# Altium PCB FlexPCB2.PcbDoc (part 1 of 2)
Units mm, origin at the board's own origin, x right, y up, seen from the top; angles counter-clockwise.
Board outline 299.18 x 60.96 mm, 2 copper layers (Top Layer, Bottom Layer); 124 components, 64 nets, 409 pads, 134 vias.
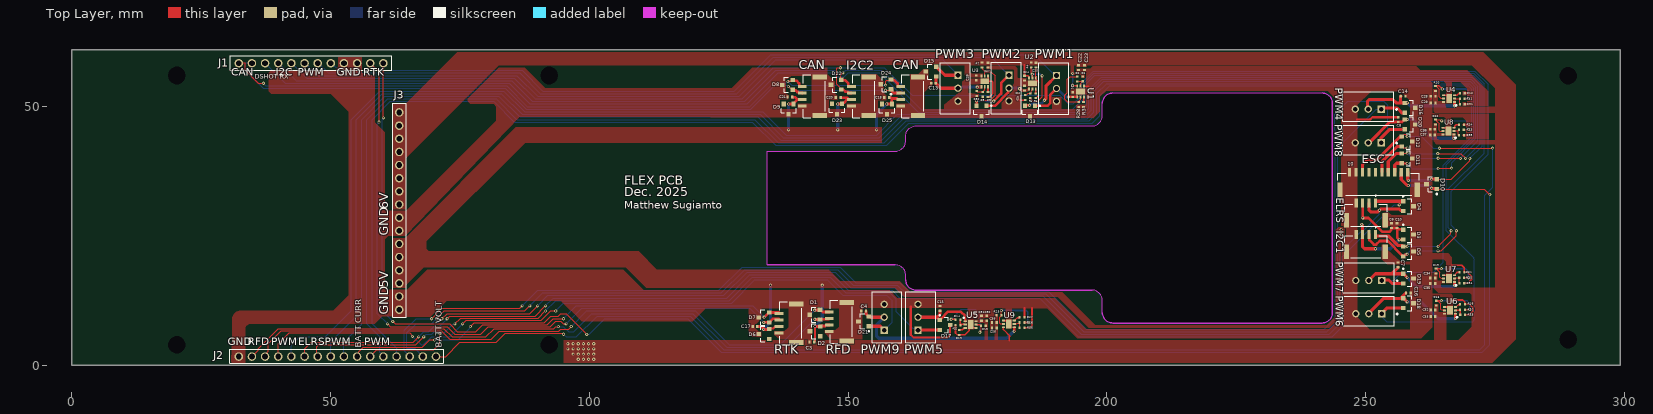
[diagram p0: Top Layer view]
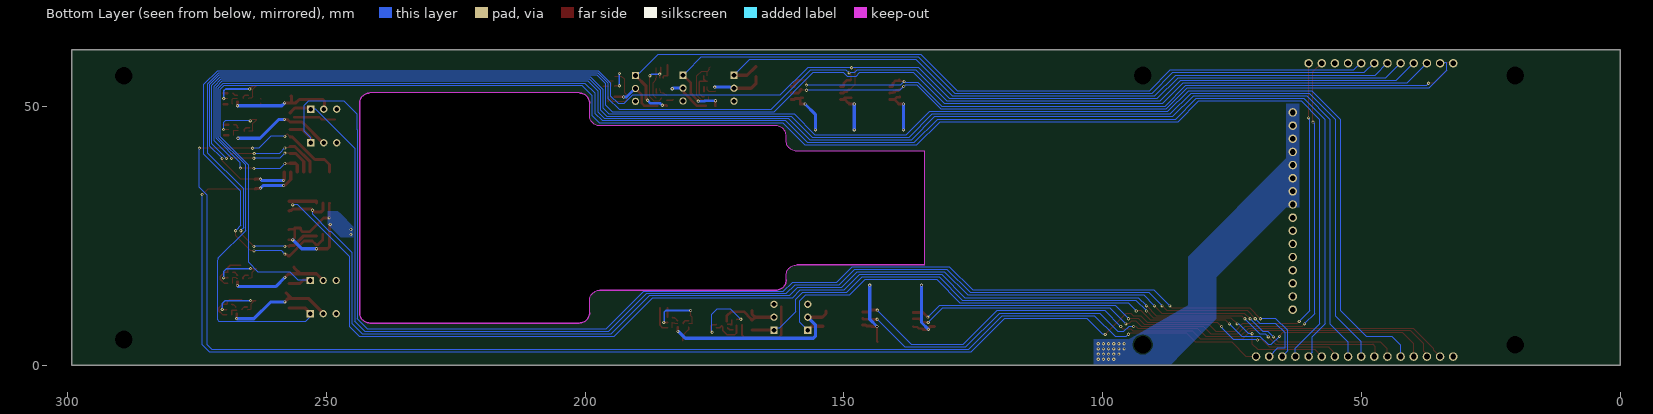
[diagram p1: Bottom Layer view, seen from below]

## Layer stack, top to bottom
Top Solder: solder mask 0.012, FC-001, Dk 4
Top Solder: solder mask 0.0102, Solder Resist, Dk 3.5
Top Layer: signal copper 0.0356
Dielectric 1: dielectric 0.32, FR-4, Dk 4.8
Bottom Layer: signal copper 0.0356
Flex Bottom Coverlay: solder mask 0.0102, Solder Resist, Dk 3.5
Flex Bottom Coverlay: solder mask 0.012, FC-001, Dk 4

## Board outline
0,0 299.175,0 299.175,60.96 0,60.96
cut-out: 161.136,44.274 cw(c163.136,44.274) 163.136,46.274 197.136,46.274 ccw(c197.136,48.274) 199.136,48.274 199.136,50.624 cw(c201.136,50.624) 201.136,52.624 241.586,52.624 cw(c241.586,50.624) 243.586,50.624 243.586,10.174 cw(c241.586,10.174) 241.586,8.174 201.136,8.174 cw(c201.136,10.174) 199.136,10.174 199.136,12.524 ccw(c197.136,12.524) 197.136,14.524 163.136,14.524 cw(c163.136,16.524) 161.136,16.524 161.136,17.399 ccw(c159.136,17.399) 159.136,19.399 134.366,19.399 134.366,41.399 159.136,41.399 ccw(c159.136,43.399) 161.136,43.399

## Design rules (kind name [scope] priority, off if disabled: settings)
Clearance [All] p1: gap=0.2 ignorepadtopadclearanceinfootprint=FALSE except(0.22: Arc-SMDPad Arc-THPad Track-SMDPad Track-THPad SMDPad-Fill SMDPad-Poly SMDPad-Region THPad-Fill THPad-Poly THPad-Region)
DiffPairsRouting [All] p1: maxlimit=0.089 minlimit=0.089 mostfreqgap=0.089 toplayer_minwidth=0.089 toplayer_maxwidth=1816.048 toplayer_prefwidth=0.089 bottomlayer_minwidth=0.089 bottomlayer_maxwidth=1816.048 bottomlayer_prefwidth=0.089 substack1={177C2C85-C0F3-46FA-9A4B-C3A18B66C70F} toplayer_{177c2c85-c0f3-46fa-9a4b-c3a18b66c70f}_mingap=0.2 toplayer_{177c2c85-c0f3-46fa-9a4b-c3a18b66c70f}_maxgap=0.3 toplayer_{177c2c85-c0f3-46fa-9a4b-c3a18b66c70f}_prefgap=0.3 toplayer_{177c2c85-c0f3-46fa-9a4b-c3a18b66c70f}_minwidth=0.089 toplayer_{177c2c85-c0f3-46fa-9a4b-c3a18b66c70f}_maxwidth=1816.048 toplayer_{177c2c85-c0f3-46fa-9a4b-c3a18b66c70f}_prefwidth=0.089 bottomlayer_{177c2c85-c0f3-46fa-9a4b-c3a18b66c70f}_mingap=0.2 bottomlayer_{177c2c85-c0f3-46fa-9a4b-c3a18b66c70f}_maxgap=0.3 bottomlayer_{177c2c85-c0f3-46fa-9a4b-c3a18b66c70f}_prefgap=0.3 bottomlayer_{177c2c85-c0f3-46fa-9a4b-c3a18b66c70f}_minwidth=0.089 bottomlayer_{177c2c85-c0f3-46fa-9a4b-c3a18b66c70f}_maxwidth=1816.048 bottomlayer_{177c2c85-c0f3-46fa-9a4b-c3a18b66c70f}_prefwidth=0.089 filterlayerstackid={177C2C85-C0F3-46FA-9A4B-C3A18B66C70F} maxuncoupledlength=12.7
HoleSize [All] p1: absolutevalues=TRUE maxlimit=5 minlimit=0.025 maxpercent=80.000 minpercent=20.000
MinimumSolderMaskSliver [All] p1: minsoldermaskwidth=0.155
PolygonConnect [All] p1: connectstyle=Direct reliefconductorwidth=0.254 reliefentries=4 polygonreliefangle="90 Angle" airgapwidth=0.254
RoutingVias [All] p1: holewidth=0.711 width=1.27 viastyle="Through Hole" minholewidth=0.711 minwidth=1.27 maxholewidth=0.711 maxwidth=1.27
SilkToSilkClearance [All] p1: silktosilkclearance=0.16
SilkToSolderMaskClearance [IsPad] p1: minsilkscreentomaskgap=0.16 clearancetoexposedcopper=TRUE
SolderMaskExpansion [All] p1: expansion=0.102 istentingtop=FALSE
SupplyNets "Schematic Supply Nets_3" [InNet('V_OUT_SERVO')] p1: voltage=0.000
SupplyNets "Schematic Supply Nets_2" [InNet('+5')] p2: voltage=0.000
SupplyNets "Schematic Supply Nets" [InNet('GND')] p3: voltage=0.000
Width Width_0.3mm [InNet('No Net')] p1: maxlimit=0.3 minlimit=0.15 preferedwidth=0.3 substack1={177C2C85-C0F3-46FA-9A4B-C3A18B66C70F} toplayer_{177c2c85-c0f3-46fa-9a4b-c3a18b66c70f}_minwidth=0.2 bottomlayer_{177c2c85-c0f3-46fa-9a4b-c3a18b66c70f}_minwidth=0.2 minimp=50.000000 maximp=50.000000 favimp=50.000000
Width Width_0.5mm [All] p2: maxlimit=2 minlimit=0.2 preferedwidth=0.3 substack1={177C2C85-C0F3-46FA-9A4B-C3A18B66C70F} minimp=50.000000 maximp=50.000000 favimp=50.000000
25 further rules are at their usual default settings.

## Classes and differential pairs
component class efuse: C22 C23 C24 C25 C26 C27 C28 C29 C30 C31 C32 C33 C34 C35 C36 C37 C38 C39 R1 R2 R4 R5 R6 R7 R8 R9 R10 R11 R12 R13 R14 R15 R16 R17 R18 R19 R20 R21 R22 R23 R24 R25 R26 R27 R28 R29 R30 R31 R32 R33 R34 R35 R36 U1 U2 U3 U4 U5 U6 U7 U8 U9
component class Connectors_Wires: C3 C4 C6 C7 C8 C10 C11 C12 C13 C14 C15 C16 C17 C18 C20 C21 CAN D1 D2 D3 D4 D5 D6 D7 D8 D9 D10 D11 D12 D13 D14 D15 D16 D17 D18 D19 D20 D21 D22 D23 D24 D25 ELRS ESC I2C1 I2C2 J1 J2 J3 PWM1 PWM2 PWM3 PWM4 PWM5 PWM6 PWM7 PWM8 PWM9 RFD RTK
differential pair CAN: +CAN_P -CAN_N

## Components (designator, comment, footprint, x,y, rotation, side; value= is the part's Value field where it differs from the comment)
C3 "100nF" "IPC C C0402 NO SILK" 143,4.5 r180 top
C4 "100nF" "IPC C C0402 NO SILK" 153,10.5 r180 top
C6 "100nF" "IPC C C0402 NO SILK" 255,27 r90 top
C7 "100nF" "IPC C C0402 NO SILK" 256.243,19.413 r90 top
C8 "100nF" "IPC C C0402 NO SILK" 256.317,47.483 r90 top
C10 "100nF" "IPC C C0402 NO SILK" 256.083,27 r90 top
C11 "100nF" "IPC C C0402 NO SILK" 193.4,52.3 r90 top
C12 "100nF" "IPC C C0402 NO SILK" 184.077,53.574 r90 top
C13 "100nF" "IPC C C0402 NO SILK" 166.5,54.5 r180 top
C14 "100nF" "IPC C C0402 NO SILK" 257.25,52 r0 top
C15 "100nF" "IPC C C0402 NO SILK" 167.75,11 r90 top
C16 "100nF" "IPC C C0402 NO SILK" 258.25,14 r0 top
C17 "100nF" "IPC C C0402 NO SILK" 132,7.5 r180 top
C18 "100nF" "IPC C C0402 NO SILK" 157.456,51.735 r180 top
C20 "100nF" "IPC C C0402 NO SILK" 148.085,51.75 r180 top
C21 "100nF" "IPC C C0402 NO SILK" 138.745,51.844 r180 top
C22 "100nF" "IPC C C0402 NO SILK" 194.513,57.531 r270 top
C23 "100nF" "IPC C C0402 NO SILK" 195.69,57.531 r270 top
C24 "100nF" "IPC C C0402 NO SILK" 184.075,55.5 r270 top
C25 "100nF" "IPC C C0402 NO SILK" 186.275,58 r270 top
C26 "100nF" "IPC C C0402 NO SILK" 174.775,55.55 r270 top
C27 "100nF" "IPC C C0402 NO SILK" 177.05,58 r270 top
C28 "100nF" "IPC C C0402 NO SILK" 263.025,51.975 r180 top
C29 "100nF" "IPC C C0402 NO SILK" 263.025,50.7 r180 top
C30 "100nF" "IPC C C0402 NO SILK" 176.795,9.095 r90 top
C31 "100nF" "IPC C C0402 NO SILK" 175.788,9.095 r90 top
C32 "100nF" "IPC C C0402 NO SILK" 263.015,10.675 r180 top
C33 "100nF" "IPC C C0402 NO SILK" 263.015,9.458 r180 top
C34 "100nF" "IPC C C0402 NO SILK" 262.975,16.85 r180 top
C35 "100nF" "IPC C C0402 NO SILK" 262.975,15.805 r180 top
C36 "100nF" "IPC C C0402 NO SILK" 262.911,45.635 r180 top
C37 "100nF" "IPC C C0402 NO SILK" 262.911,44.505 r180 top
C38 "100nF" "IPC C C0402 NO SILK" 178.267,7.206 r180 top
C39 "100nF" "IPC C C0402 NO SILK" 178.267,8.298 r180 top
CAN "BM04B-GHS-TBT(LF)(SN)(N)" JST_BM04B-GHS-TBT(LF)(SN)(N) 163.5,52 r90 top (schematic designator CAN_2)
CAN "BM04B-GHS-TBT(LF)(SN)(N)" JST_BM04B-GHS-TBT(LF)(SN)(N) 144.5,52 r90 top
D1 "MMBZ9V1ALT1G" ONSC-SOT-23-3-318-08_V 143.573,9.783 r180 top
D2 "MMBZ9V1ALT1G" ONSC-SOT-23-3-318-08_V 143.625,6.575 r180 top
D3 "MMBZ9V1ALT1G" ONSC-SOT-23-3-318-08_V 258.25,25.25 r0 top
D4 "MMBZ9V1ALT1G" ONSC-SOT-23-3-318-08_V 258.25,30.75 r0 top
D5 "MMBZ9V1ALT1G" ONSC-SOT-23-3-318-08_V 258.25,22 r0 top
D6 "MMBZ9V1ALT1G" ONSC-SOT-23-3-318-08_V 133.725,6.05 r180 top
D7 "MMBZ9V1ALT1G" ONSC-SOT-23-3-318-08_V 133.725,9.25 r180 top
D8 "MMBZ9V1ALT1G" ONSC-SOT-23-3-318-08_V 138.3,54.2 r180 top
D9 "MMBZ9V1ALT1G" ONSC-SOT-23-3-318-08_V 138.5,49.5 r270 top
D10 "MMBZ9V1ALT1G" ONSC-SOT-23-3-318-08_V 262.75,35 r180 top
D11 "MMBZ9V1ALT1G" ONSC-SOT-23-3-318-08_V 258,40 r0 top
D12 "MMBZ9V1ALT1G" ONSC-SOT-23-3-318-08_V 258,43.25 r0 top
D13 "MMBZ9V1ALT1G" ONSC-SOT-23-3-318-08_V 185.15,49.15 r270 top
D14 "MMBZ9V1ALT1G" ONSC-SOT-23-3-318-08_V 175.775,49.15 r270 top
D15 "MMBZ9V1ALT1G" ONSC-SOT-23-3-318-08_V 166,56.75 r180 top
D16 "MMBZ9V1ALT1G" ONSC-SOT-23-3-318-08_V 258.569,49.769 r0 top
D17 "MMBZ9V1ALT1G" ONSC-SOT-23-3-318-08_V 168.7,7.8 r0 top
D18 "MMBZ9V1ALT1G" ONSC-SOT-23-3-318-08_V 258.25,12 r0 top
D19 "MMBZ9V1ALT1G" ONSC-SOT-23-3-318-08_V 258.25,16.75 r0 top
D20 "MMBZ9V1ALT1G" ONSC-SOT-23-3-318-08_V 258.569,46.569 r0 top
D21 "MMBZ9V1ALT1G" ONSC-SOT-23-3-318-08_V 153,8.5 r180 top
D22 "MMBZ9V1ALT1G" ONSC-SOT-23-3-318-08_V 147.682,54.224 r180 top
D23 "MMBZ9V1ALT1G" ONSC-SOT-23-3-318-08_V 147.846,49.52 r270 top
D24 "MMBZ9V1ALT1G" ONSC-SOT-23-3-318-08_V 157.276,54.3 r180 top
D25 "MMBZ9V1ALT1G" ONSC-SOT-23-3-318-08_V 157.5,49.5 r270 top
ELRS "BM04B-GHS-TBT(LF)(SN)(N)" JST_BM04B-GHS-TBT(LF)(SN)(N) 250.05,28 r0 top
ESC "BM10B-GHS-TBT(LF)(SN)(N)" JST_BM10B-GHS-TBT(LF)(SN)(N) 252.5,35 r0 top
I2C1 "BM04B-GHS-TBT(LF)(SN)(N)" JST_BM04B-GHS-TBT(LF)(SN)(N) 250.05,21.925 r0 top (schematic designator I2C_1)
I2C2 "BM04B-GHS-TBT(LF)(SN)(N)" JST_BM04B-GHS-TBT(LF)(SN)(N) 154,52 r90 top (schematic designator I2C_2)
J1 "1x12 Pin Female Header, 2.54mm Pitch" "1x12 Pin Female Header, 2.54mm Pitch-Footprint-1" 60.2,58.375 r0 top
J2 "1x16 Pin Female Header, 2.54mm Pitch" "New footprint 1" 70.36,1.7 r0 top locked
J3 "1x16 Pin Female Header, 2.54mm Pitch" "New footprint 1" 63.26,10.76 r270 top
PWM1 "B3B-XH-A(LF)(SN)" FP-B3B-XH-A_LF_SN-MFG 189.746,53.507 r270 top
PWM2 "B3B-XH-A(LF)(SN)" FP-B3B-XH-A_LF_SN-MFG 180.552,53.569 r270 top
PWM3 "B3B-XH-A(LF)(SN)" FP-B3B-XH-A_LF_SN-MFG 170.713,53.543 r270 top
PWM4 "B3B-XH-A(LF)(SN)" FP-B3B-XH-A_LF_SN-MFG 250.5,50.025 r180 top
PWM5 "B3B-XH-A(LF)(SN)" FP-B3B-XH-A_LF_SN-MFG 164.025,9.3 r90 top
PWM6 "B3B-XH-A(LF)(SN)" FP-B3B-XH-A_LF_SN-MFG 250.6,10.5 r180 top
PWM7 "B3B-XH-A(LF)(SN)" FP-B3B-XH-A_LF_SN-MFG 250.6,16.925 r180 top
PWM8 "B3B-XH-A(LF)(SN)" FP-B3B-XH-A_LF_SN-MFG 250.5,43.525 r180 top
PWM9 "B3B-XH-A(LF)(SN)" FP-B3B-XH-A_LF_SN-MFG 157.5,9.3 r90 top
R1 "47K" "IPC C R0402 NO SILK" 195.344,55.369 r90 top
R2 "160K" "IPC C R0402 NO SILK" 194.256,55.328 r270 top
R3 "34.8K" "IPC C R0402 NO SILK" 195.475,50.425 r90 top
R4 "47K" "IPC C R0402 NO SILK" 185.375,58.025 r90 top
R5 "160K" "IPC C R0402 NO SILK" 185.197,52.08 r270 top
R6 "34.8K" "IPC C R0402 NO SILK" 186.236,52.092 r90 top
R7 "47K" "IPC C R0402 NO SILK" 175.875,58.05 r90 top
R8 "160K" "IPC C R0402 NO SILK" 175.995,52.371 r270 top
R9 "34.8K" "IPC C R0402 NO SILK" 177.021,52.365 r90 top
R10 "47K" "IPC C R0402 NO SILK" 263.488,53.507 r270 top
R11 "160K" "IPC C R0402 NO SILK" 268.671,51.502 r0 top
R12 "34.8K" "IPC C R0402 NO SILK" 268.677,52.547 r180 top
R13 "47K" "IPC C R0402 NO SILK" 176.119,7.65 r0 top
R14 "160K" "IPC C R0402 NO SILK" 171.213,8.833 r180 top
R15 "34.8K" "IPC C R0402 NO SILK" 171.46,6.376 r90 top
R16 "47K" "IPC C R0402 NO SILK" 263.637,12 r270 top
R17 "160K" "IPC C R0402 NO SILK" 268.727,10.775 r0 top
R18 "34.8K" "IPC C R0402 NO SILK" 268.738,11.842 r180 top
R19 "47K" "IPC C R0402 NO SILK" 263.587,18.2 r270 top
R20 "160K" "IPC C R0402 NO SILK" 268.562,16.901 r0 top
R21 "34.8K" "IPC C R0402 NO SILK" 268.586,17.966 r180 top
R22 "47K" "IPC C R0402 NO SILK" 263.488,47.038 r270 top
R23 "160K" "IPC C R0402 NO SILK" 268.48,45.519 r0 top
R24 "34.8K" "IPC C R0402 NO SILK" 268.493,46.505 r180 top
R25 "47K" "IPC C R0402 NO SILK" 179.15,9.675 r180 top
R26 "160K" "IPC C R0402 NO SILK" 183.6,8.278 r0 top
R27 "34.8K" "IPC C R0402 NO SILK" 183.6,9.3 r180 top
R28 "68K" "IPC C R0402 NO SILK" 194.575,50.425 r90 top
R29 "68K" "IPC C R0402 NO SILK" 184.195,51.736 r90 top
R30 "68K" "IPC C R0402 NO SILK" 174.85,52.5 r90 top
R31 "68K" "IPC C R0402 NO SILK" 268.675,50.475 r180 top
R32 "68K" "IPC C R0402 NO SILK" 171.225,7.775 r0 top
R33 "68K" "IPC C R0402 NO SILK" 268.75,9.75 r180 top
R34 "68K" "IPC C R0402 NO SILK" 268.571,15.833 r180 top
R35 "68K" "IPC C R0402 NO SILK" 268.487,44.489 r180 top
R36 "68K" "IPC C R0402 NO SILK" 183.6,7.25 r180 top
RFD "BM04B-GHS-TBT(LF)(SN)(N)" JST_BM04B-GHS-TBT(LF)(SN)(N) 149.7,8.425 r90 top
RTK "BM04B-GHS-TBT(LF)(SN)(N)" JST_BM04B-GHS-TBT(LF)(SN)(N) 139.975,8.125 r90 top
U1 "TPS25961DRVR" TPS25961DRVR-Footprint-1#1 194.926,52.92 r90 top
U2 "TPS25961DRVR" TPS25961DRVR-Footprint-1#1 185.598,54.482 r90 top
U3 "TPS25961DRVR" TPS25961DRVR-Footprint-1#1 176.403,54.873 r90 top
U4 "TPS25961DRVR" TPS25961DRVR-Footprint-1#2 266.125,51.55 r180 top
U5 "TPS25961DRVR" TPS25961DRVR-Footprint-1#1 173.684,7.885 r0 top
U6 "TPS25961DRVR" TPS25961DRVR-Footprint-1#1 266.3,10.625 r180 top
U7 "TPS25961DRVR" TPS25961DRVR-Footprint-1#1 266.1,16.775 r180 top
U8 "TPS25961DRVR" TPS25961DRVR-Footprint-1#3 266,45.275 r180 top
U9 "TPS25961DRVR" TPS25961DRVR-Footprint-1#1 181.05,8 r180 top

## Footprints (in the part's own frame and the unit in brackets; to place one, negate y for a bottom-side part, rotate by r counter-clockwise, add the part's x,y. Pads: shape width x height; smd on the part's side, far side on the other; paste and mask are expansions set on the pad)
"1x12 Pin Female Header, 2.54mm Pitch-Footprint-1" [mm]
  round 1.65 hole 1.1: 1(0,0) 2(-2.54,0) 3(-5.08,0) 4(-7.62,0) 5(-10.16,0) 6(-12.7,0) 7(-15.24,0) 8(-17.78,0) 9(-20.32,0) 10(-22.86,0) 11(-25.4,0) 12(-27.94,0)
  silkscreen extent -29.59,-1.4 1.65,1.4, body extent -29.46,-1.25 1.52,1.25, height 5
FP-B3B-XH-A_LF_SN-MFG [mm]
  rect 1.4x1.4 hole 0.9 paste-2539.97 mask+0: 1(-2.5,0.525)
  round 1.4 hole 0.9 paste-2539.97 mask+0: 2(0,0.525) 3(2.5,0.525)
  silkscreen extent -4.95,-2.88 4.95,2.88, body extent -5.05,-2.98 5.05,2.98, height 0.25
"IPC C C0402 NO SILK" [mm] "Chip Capacitor, 2-Leads, Body 1.02x0.51mm, IPC High Density"
  rect 0.46x0.54 smd: 1(-0.46,0) 2(0.46,0)
  body extent -0.51,-0.26 0.51,0.25, height 0.51
"IPC C R0402 NO SILK" [mm] "Chip Resistor, 2-Leads, Body 1.02x0.51mm, IPC High Density"
  rect 0.4x0.5 smd: 1(-0.475,0) 2(0.475,0)
  body extent -0.51,-0.26 0.51,0.26, height 0.26
JST_BM04B-GHS-TBT(LF)(SN)(N) [mm]
  rect 0.6x1.7 smd: 1(1.875,3.35) 2(0.625,3.35) 3(-0.625,3.35) 4(-1.875,3.35)
  rect 1x2.8 smd: S1(-3.725,0) S2(3.725,0)
  silkscreen extent -4.13,-1.1 4.13,3.15, body extent -4.13,-1.11 4.13,3.84, height 4.05
JST_BM10B-GHS-TBT(LF)(SN)(N) [mm]
  rect 0.6x1.7 smd: 1(5.625,2.325) 2(4.375,2.325) 3(3.125,2.325) 4(1.875,2.325) 5(0.625,2.325) 6(-0.625,2.325) 7(-1.875,2.325) 8(-3.125,2.325) 9(-4.375,2.325) 10(-5.625,2.325)
  rect 1x2.8 smd: S1(-7.475,-1.025) S2(7.475,-1.025)
  silkscreen extent -7.88,-2.12 7.88,2.12, body extent -7.88,-2.12 7.88,2.83, height 4.2
"New footprint 1" [mm]
  round 1.65 hole 1.1: 1(0,0) 2(-2.54,0) 3(-5.08,0) 4(-7.62,0) 5(-10.16,0) 6(-12.7,0) 7(-15.24,0) 8(-17.78,0) 9(-20.32,0) 10(-22.86,0) 11(-25.4,0) 12(-27.94,0) 13(-30.48,0) 14(-33.02,0) 15(-35.56,0) 16(-38.1,0)
  silkscreen extent -39.87,-1.25 1.47,1.4, body extent -39.62,-1.25 1.52,1.25, height 5
ONSC-SOT-23-3-318-08_V [mm] "SOT23, 3-Leads, Body 2.92x1.3mm, Pitch 0.95mm"
  rect 0.9x0.8 smd: 1(-1,0.95) 2(-1,-0.95) 3(1,0)
  silkscreen extent -0.17,-1.46 0.65,1.46, body extent -0.65,-1.46 0.65,1.46, height 1.11
TPS25961DRVR-Footprint-1#1 [mm]
  rect 0.6x0.35 smd mask-2539.97: 1(-1.05,0.65) 2(-1.05,0) 3(-1.05,-0.65) 4(1.05,-0.65) 5(1.05,0) 6(1.05,0.65)
  rect 1.1x1.7 smd: 7(0,0)
  body extent -1.05,-1 1.05,1, height 0.8
TPS25961DRVR-Footprint-1#2 [mm]
  rect 0.6x0.35 smd mask-2539.97: 1(-1.05,0.65) 2(-1.05,0) 3(-1.05,-0.65) 4(1.05,-0.65) 5(1.05,0) 6(1.05,0.65)
  rect 1.1x1.7 smd mask+0.102: 7(0,0)
  silkscreen extent -1.48,1.2 -1.23,1.45, body extent -1.05,-1 1.05,1, height 0.8
TPS25961DRVR-Footprint-1#3 [mm]
  rect 0.6x0.35 smd mask-2539.97: 1(-1.05,0.65) 2(-1.05,0) 3(-1.05,-0.65) 4(1.05,-0.65) 5(1.05,0) 6(1.05,0.65)
  rect 1.1x1.7 smd mask-2539.97: 7(0,0)
  silkscreen extent -1.48,1.2 -1.23,1.45, body extent -1.05,-1 1.05,1, height 0.8

## Part data
C3 C4 C6 C7 C8 C10 C11 C12 C13 C14 C15 C16 C17 C18 C20 C21: library part CMP-002-000000-1, Design Item ID="Generic CAP 0402", Source=Schlib1.SchLib
C22 C23 C24 C25 C26 C27 C28 C29 C30 C31 C32 C33 C34 C35 C36 C37 C38 C39: library part CMP-002-000000-2, "Input capacitor", Design Item ID="Generic CAP 0402", Source=Schlib1.SchLib
CAN CAN ELRS I2C1 I2C2 RFD RTK: library part CMP-003-000009-3, "Conn Shrouded Header HDR 4 POS 1.25mm Solder ST Top Entry SMD T/R", Package=None, Check_prices=https://www.snapeda.com/parts/BM04B-GHS-TBT%20(LF)(SN)(N)/JST/view-part/?ref=eda, Component Type=Standard, Design Item ID=BM04B-GHS-TBT(LF)(SN)(N), MF=JST, MP="BM04B-GHS-TBT (LF)(SN)(N)", Pin Count=6, SnapEDA_Link=https://www.snapeda.com/parts/BM04B-GHS-TBT%20(LF)(SN)(N)/JST/view-part/?ref=snap, Source=BM04B-GHS-TBT(LF)(SN)(N).SchLib
D1 D2 D3 D4 D5 D6 D7 D8 D9 D10 D11 D12 D13 D14 D15 D16 D17 D18 D19 D20 D21 D22 D23 D24 D25: library part CMP-1060-01253-1, "24 W Peak Power Zener Transient Voltage Suppressor, Dual Common Anode Zeners for ESD Protection, 3-Pin SOT-23, Pb-Free, Tape and Reel", Manufacturer="On Semiconductor", ComponentLink1Description="Manufacturer URL", ComponentLink1URL=http://www.onsemi.com/, ComponentLink2Description=Datasheet, ComponentLink2URL=http://www.onsemi.cn/pub_link/Collateral/MMBZ5V6ALT1-D.PDF, ComponentLink3Description="Package Specification", ComponentLink3URL=http://www.onsemi.cn/pub_link/Collateral/318-08.PDF, DatasheetVersion="Rev. 13", Mounting Technology="Surface Mount", PackageDescription="3-Pin Small Outline Transistor, Body 2.92 x 1.3 mm, Pitch 0.95 mm", PackageReference=SOT-23-3-318-08, PackageVersion="Rev. AP, 11/2009", Packing="Tape and Reel", PartNumber=MMBZ9V1ALT1G, RoHS=Pb-Free, VZ Typ (V)=9.1
ESC: library part CMP-003-000010-2, "Connector Header Surface Mount 10 position 0.049 (1.25mm)", Package=None, Availability="In Stock", Check_prices=https://www.snapeda.com/parts/BM10B-GHS-TBT(LF)(SN)(N)/JST+Sales+America+Inc./view-part/?ref=eda, Component Type=Standard, Design Item ID=BM10B-GHS-TBT(LF)(SN)(N), MF="JST Sales", MP=BM10B-GHS-TBT(LF)(SN)(N), Pin Count=12, Price=None, Purchase-URL=https://pricing.snapeda.com/search/part/BM10B-GHS-TBT(LF)(SN)(N)/?ref=eda, SnapEDA_Link=https://www.snapeda.com/parts/BM10B-GHS-TBT(LF)(SN)(N)/JST+Sales+America+Inc./view-part/?ref=snap, Source=BM10B-GHS-TBT(LF)(SN)(N).SchLib
J1: library part CMP-003-000007-1
J2 J3: library part CMP-00039-2
PWM1 PWM2 PWM3 PWM4 PWM5 PWM6 PWM7 PWM8 PWM9: library part CMP-17439-000014-3, "CONN HEADER VERT 3POS 2.5MM", Color=Natural, Contact Resistance=20mR, Current Rating=3A, Flammability Rating="UL94 V-0", Housing Color=White, Insulation Resistance=1GR, Max Operating Temperature=85°C, Max Voltage Rating (AC)=250V, Min Operating Temperature=-25°C, Connector Type=Header, Contact Finish - Mating=TIN, Contact Material=Brass, Contact Plating=Tin, Contact Shape=Square, Contact Type="Male Pin", Depth=5.75mm, Fastening Type=Detent, Gender=Male, Housing Material=Polyamide, Insulation Color=Natural, Insulation Material=Nylon, Lead Free="Lead Free", Lead Pitch=2.5mm, Length=9.9mm, Max Current Rating=3A, Max Voltage Rating (DC)=250V, Mount="Through Hole", Number of Contacts=3, Number of Positions=3, Number of Rows=1, Orientation=Straight, Packaging=Bulk, Pitch=2.5mm, REACH SVHC="No SVHC", Series=XH, Termination=Solder, Voltage Rating=250V, Voltage Rating (AC)=250V, Wire/Cable Gauge=22AWG
R1 R2 R3 R4 R5 R6 R7 R8 R9 R10 R11 R12 R13 R14 R15 R16 R17 R18 R19 R20 R21 R22 R23 R24 R25 R26 R27 R28 R29 R30 R31 R32 R33 R34 R35 R36: library part CMP-008-000000-2, "Generic RES 0402", Design Item ID="Generic RES 0402", Source=Schlib1.SchLib
U1 U2 U3 U4 U5 U6 U7 U8 U9: library part CMP-00038-2, "2.7-V TO 19-V 100-M EFUSE WITH O Hot Swap Controller 1 Channel General Purpose 6-WSON (2x2)", Manufacturer Lifecycle Status=ACTIVE, Height=800µm, Length=2mm, Lifecycle Status=Production, Pins=6, RoHS=Compliant, Thickness=750µm, Width=2mm

## Free pads (board coordinates)
  round 1.524 hole 3.4 unplated mask-10: 2(20.26,56) 2(92.26,4) 2(92.26,56) 2(289.175,5) 2(289.175,55.96) 4(20.26,4)

## Via types
v1: diameter 0.6, hole 0.3, Top Layer to Bottom Layer, tented both sides, 134 vias

## Nets (pads, with @x,y where several pads share a name; then routed paths per layer and width w, separated by ;. In a path a pad name is that pad's centre, name@x,y a point inside that pad or via, vN(x,y) a via of type N, cw(c..) or ccw(c..) an arc to the next point about the centre after c; other vN are vias at no path point)
+5: C3.1 C6.1 C10.1 C17.1 C18.1 C20.1 C21.1 CAN.3 D2.2 D3.1 D3.2 D6.2 D9.1 D23.1 D25.1 ELRS.3 I2C1.3 I2C2.3 J3.3 J3.4 J3.5 J3.6 RFD.3 RTK.3 | length 85.1
  Top Layer w0.4: D6.2@134.725,7 134.775,7 134.894,7.119 135.505,7.119 135.786,7.4 136.525,7.4 RTK.3@136.625,7.5 ; C3.1@143.46,4.5 143.6,4.64 v1(143.6,7.5)
  Top Layer w0.5: v1(138.5,50.5) D9.1@139.45,50.5 ; C21.1@139.205,51.844 139.222,51.827 139.776,51.827 140.228,51.375 CAN.3@141.15,51.375 ; D9.1@139.45,50.55 140.225,51.325 ; v1(148,50.5) D23.1@148.95,50.5 ; C20.1@148.565,51.73 148.74,51.73 148.745,51.725 149.757,51.725 150.05,51.432 150.05,51.425 I2C2.3@150.1,51.375 ; D23.1@148.975,50.5 148.975,50.575 149.1,50.7 149.175,50.7 149.8,51.325 150.05,51.325 I2C2.3@150.1,51.375 ; I2C2.3@150.65,51.375 I2C2.3@150.1,51.375 ; v1(157.5,50.5) D25.1@158.45,50.5 158.45,51.592 158.327,51.715 157.936,51.715 C18.1@157.916,51.735 ; 158.515,51.567 159.408,51.567 159.6,51.375 CAN.3@160.15,51.375 ; ELRS.3@249.375,31.35 249.412,31.313 249.412,28.513 v1(249.45,28.475) 250.55,28.475 253.225,25.8 254.567,25.8 254.98,26.213 254.98,26.52 C6.1@255,26.54 C10.1@255.872,26.54 ; D3.2@257.25,24.3 257.219,24.269 256.519,24.269 v1(256.5,24.25) 256.083,24.667 C10.1@256.083,26.54 256.347,26.276 257.174,26.276 D3.1@257.25,26.2
  Top Layer w0.6: C17.1@132.479,7.481 133.324,7.481 133.675,7.129 v1(133.675,6.95) D6.2@134.725,6.95 ; v1(143.6,7.5) 143.612,7.512 144.613,7.512 D2.2@144.625,7.525 144.725,7.625 145.625,7.625 145.8,7.8 RFD.3@146.35,7.8 ; v1(249.25,27.25) 249.25,27.223 249.375,27.098 I2C1.3@249.375,25.35 ; I2C1.3@249.425,25.275 249.425,22.876 249.776,22.525 v1(251.9,22.525)
  Bottom Layer w0.6: v1(133.675,6.95) 135,8.275 v1(135,15.5) ; v1(138.5,45.5) v1(138.5,50.5) ; v1(143.6,7.5) 145,8.9 v1(145,15.5) ; v1(148,45.5) v1(148,50.5) ; v1(155.5,45.5) 155.5,48.5 v1(157.5,50.5) ; v1(251.9,22.525) 254.775,22.525 v1(256.5,24.25)
  other v1: 245.25,25.25 245.25,26.25
CAN_N: CAN.2 D8.1 D24.1 J1.11 | length 138.6
  Top Layer w0.2: v1(138.45,53.875) 138.45,53.867 138.767,53.55 139,53.55 D8.1@139.3,53.25 ; v1(157.225,53.15) 158.076,53.15 D24.1@158.276,53.35
  Top Layer w0.5: D8.1@139.3,53.25 139.45,53.1 139.902,53.1 140.186,52.815 140.41,52.815 140.55,52.675 141.057,52.675 CAN.2@141.107,52.625 ; D24.1@158.276,53.35 158.326,53.35 158.476,53.2 158.476,52.918 158.769,52.625 CAN.2@160.15,52.625
  Bottom Layer w0.2: J1.11@34.8,58.5 33.617,58.5 33.5,58.383 33.5,57 37,53.5 83.793,53.5 87.793,49.5 131.207,49.5 135.828,54.121 138.133,54.121 138.379,53.875 v1(138.45,53.875) ; v1@138.4,53.825 138.5,53.825 139.175,53.15 v1(157.225,53.15)
CAN_P: CAN.1 D8.2 D24.2 J1.12 | length 140.1
  Top Layer w0.2: J1.12@32.26,58.5 33.383,58.5 33.5,58.383 33.5,57 36,54.5 v1(37,54.5) ; v1(157.226,54.15) 157.226,54.909 157.442,55.126 D24.2@158.426,55.126
  Top Layer w0.3: v1(138.35,54.875) 138.949,54.875 138.974,54.9 139.175,54.9 D8.2@139.425,55.15
  Top Layer w0.5: D8.2@139.3,55.15 139.45,55 140.025,55 140.55,54.475 140.55,53.925 140.6,53.875 CAN.1@141.15,53.875 ; D24.2@158.426,55.126 158.899,55.126 159.55,54.475 159.55,53.925 159.6,53.875 CAN.1@160.15,53.875
  Bottom Layer w0.2: v1(37,54.5) 37.5,54 84,54 88,50 131,50 135.621,54.621 138.033,54.621 138.287,54.875 v1(138.35,54.875) 139.075,54.15 v1(157.226,54.15)
DSHOT_RX: D10.2 ESC.1 J1.10 | length 281.6
  Top Layer w0.2: D10.2@263.75,35.95 266.55,35.95 270.139,39.539 v1(270.139,39.99)
  Top Layer w0.6: ESC.1@258.125,37.325 258.125,35.875 v1(258.25,35.75) ; v1(262.75,36) 262.769,35.981 263.719,35.981 D10.2@263.75,35.95
  Bottom Layer w0.2: J1.10@37.34,58.375 41.215,54.5 84.5,54.5 88.5,50.5 130.5,50.5 136.5,56.5 147,56.5 147.75,55.75 149.25,55.75 150,56.5 156,56.5 163.55,48.95 194.675,48.95 196,50.275 196,54.405 197.652,56.057 270.758,56.057 272.5,54.316 272.5,42.359 270.139,39.997 v1(270.139,39.99)
  Bottom Layer w0.6: v1(258.25,35.75) 262.473,35.75 262.723,36 v1(262.75,36)
ELRS_RX: D4.2 ELRS.2 J2.11 | length 247.3
  Top Layer w0.2: J2.11@44.96,1.7 44.96,3.21 46.25,4.5 66,4.5 v1(67,5.5) ; v1(71.5,9) 72.5,10 88.5,10 v1(90,11.5)
  Top Layer w0.6: ELRS.2@250.625,31.35 250.625,30.001 250.976,29.65 252.35,29.65 252.9,30.2 256.524,30.2 256.824,29.9 257.15,29.9 D4.2@257.25,29.8
  Bottom Layer w0.2: v1(67,5.5) 68,6.5 69,6.5 v1(71.5,9) ; v1(90,11.5) 92,13.5 126,13.5 130.5,18 147.5,18 150.5,15 159,15 160.6,13.4 187.6,13.4 195,6 243,6 245,8 245,21.75 249.077,25.827 249.327,25.827 252.675,29.175 v1(252.675,29.975)
ELRS_TX: D4.1 ELRS.1 J2.10 | length 247.4
  Top Layer w0.2: J2.10@47.5,1.7 47.32,1.88 47.32,3.633 47.733,4.046 47.787,4.1 ; 47.787,3.992 66.492,3.992 v1(68,5.5) ; v1(72.5,9) 73,9.5 89.5,9.5 v1(91.5,11.5) ; v1(256.5,31) 256.5,31.1 257.25,31.85 D4.1@257.3,31.85
  Top Layer w0.6: ELRS.1@251.875,31.35 251.875,31.7 D4.1@257.25,31.7
  Bottom Layer w0.2: v1(68,5.5) 68.5,6 69.5,6 v1(72.5,9) ; v1(91.5,11.5) 93,13 126.5,13 131,17.5 147,17.5 150,14.5 158.5,14.5 160,13 187,13 194.5,5.5 243.566,5.5 245.5,7.434 245.5,21 255.5,31 v1(256.5,31)
GND: C3.2 C4.2 C6.2 C7.2 C8.2 C10.2 C11.2 C12.2 C13.2 C14.2 C15.2 C16.2 C17.2 C18.2 C20.2 C21.2 C22.2 C23.2 C24.2 C25.2 C26.2 C27.2 C28.2 C29.2 C30.2 C31.2 C32.2 C33.2 C34.2 C35.2 C36.2 C37.2 C38.2 C39.2 CAN.4 CAN.S1 CAN.S2 D1.3 D2.3 D3.3 D4.3 D5.3 D6.3 D7.3 D8.3 D9.3 D10.3 D11.3 D12.3 D13.3 D14.3 D15.3 D16.3 D17.3 D18.3 D19.3 D20.3 D21.3 D22.3 D23.3 D24.3 D25.3 ELRS.4 ELRS.S1 ELRS.S2 ESC.9 ESC.10 ESC.S1 ESC.S2 I2C1.4 I2C1.S1 I2C1.S2 I2C2.4 I2C2.S1 I2C2.S2 J1.3 J1.4 J2.16 J3.1 J3.2 J3.7 J3.8 PWM1.3 PWM2.3 PWM3.3 PWM4.3 PWM5.3 PWM6.3 PWM7.3 PWM8.3 PWM9.3 R3.1 R6.1 R9.1 R12.1 R15.1 R18.1 R21.1 R24.1 R27.1 R28.1 R29.1 R30.1 R31.1 R32.1 R33.1 R34.1 R35.1 R36.1 RFD.4 RFD.S1 RFD.S2 RTK.4 RTK.S1 RTK.S2 U1.4 U1.7 U2.4 U2.7 U3.4 U3.7 U4.4 U4.7 U5.4 U5.7 U6.4 U6.7 U7.4 U7.7 U8.4 U8.7 U9.4 U9.7 | length 77.4
  Top Layer w0.2: R6.1@186.236,51.617 186.286,51.617 186.856,52.187 186.856,54.614 186.323,55.147 186.323,55.457 U2.4@186.248,55.532 ; C25.2@186.275,57.54 186.275,55.818 U2.4@186.342,55.751
  Top Layer w0.3: R32.1@170.75,7.775 170.75,6.25 171.128,5.872 171.725,5.872 ; R15.1@171.625,5.922 172.597,5.922 173.436,6.761 173.436,7.486 173.6,7.65 174,7.25 U5.4@174.65,7.25 ; U3.7@176.403,54.873 U3.7@176.653,54.873 ; R9.1@177.021,51.89 177.071,51.94 177.365,51.94 177.975,52.55 177.975,54.697 177.799,54.873 U3.7@176.653,54.873 ; U3.4@177.053,55.923 177.053,55.273 U3.7@176.653,54.873 ; U9.4@180,8.65 180.65,8.65 181.05,8.25 U9.7@181.05,8 ; PWM2.3@181.077,51.069 PWM2.3@181.082,51.074 ; 183,51.3 183.039,51.261 R29.1@184.195,51.261 ; R36.1@184.075,7.25 185.05,7.25 ; R27.1@184.075,9.3 184.075,11.1 ; 185.15,7.25 185.05,7.25 ; 185.525,11.075 185.525,7.725 185.05,7.25 ; U1.4@195.576,53.97 196.47,53.97 ; C29.2@262.637,50.677 C29.2@262.64,50.675 ; 262.64,51.525 262.642,51.523 ; U8.4@264.85,45.925 265.5,45.925 265.9,45.525 U8.7@265.9,45.275 ; U7.4@265.05,17.425 265.7,17.425 266.1,17.025 U7.7@266.1,16.775 ; U4.4@265.075,52.2 265.725,52.2 266.082,51.842 U4.7@266.082,51.619 ; U6.4@265.25,11.275 265.9,11.275 U6.7@266.3,10.875 ; 266.35,12.625 268.8,12.625 269.163,12.262 269.163,11.892 R18.1@269.213,11.842 270.018,11.842 270.772,11.088 270.772,10.55 269.972,9.75 R33.1@269.225,9.75 ; 266.5,19.35 268.575,19.35 269.061,18.864 R21.1@269.061,17.966 269.068,17.959 269.711,17.959 270.5,17.169 270.5,16.631 269.702,15.833 R34.1@269.046,15.833 ; 269.855,46.505 269.86,46.5
  Top Layer w0.4: 162.1,11.346 162.1,5.896 162.6,5.396 169.221,5.396 169.7,5.875 D17.3@169.7,7.8 ; 248.375,47.5 250.85,47.5 251.285,47.935 C8.2@256.225,47.935
  Top Layer w0.5: R35.1@268.962,44.489 269.739,44.489 ; R24.1@268.968,46.505 269.855,46.505 ; R31.1@269.15,50.475 269.775,50.475 ; R12.1@269.152,52.547 269.872,52.547
M_BATT_CURR_IN: D10.1 ESC.2 J2.7 | length 277.8
  Top Layer w0.2: J2.7@55.12,1.7 55.397,1.977 55.397,2.577 56.255,3.435 ; 56.255,3.483 67.708,3.483 69.125,4.9 v1(70.1,4.9) ; v1(77,7.5) 77.775,8.275 91.275,8.275 92.5,9.5 94,9.5 94.5,10 95.484,10 v1(99.5,5.984) ; D10.1@263.75,34.05 272.95,34.05 v1(274,33)
  Top Layer w0.6: ESC.2@256.875,37.325 256.875,35.923 258.048,34.75 v1(258.25,34.75) ; v1(262.75,34.25) 262.777,34.25 262.877,34.15 263.65,34.15 D10.1@263.75,34.05
  Bottom Layer w0.2: v1(70.1,4.9) 74.663,4.9 76.923,7.16 76.923,7.423 v1(77,7.5) ; v1(99.5,5.984) 99.518,6.001 100.001,6.001 103,9 119,9 125.5,2.5 272.5,2.5 274,4 v1(274,33)
  Bottom Layer w0.6: v1(258.25,34.75) 262.223,34.75 262.723,34.25 v1(262.75,34.25)
M_BATT_VOLT_IN: D12.1 ESC.8 J2.1 | length 278.3
  Top Layer w0.2: J2.1@70.36,1.7 72.2,1.7 75,4.5 82,4.5 83.7,6.2 94.692,6.2 94.892,6 v1(95,6) ; D12.1@257,44.2 257.05,44.2 257.467,44.617 257.633,44.617 v1(258,44.25) ; v1@264.267,41.95 274.5,41.95 v1(274.525,41.975)
  Top Layer w0.6: ESC.8@249.375,37.325 249.375,38.799 250.351,39.775 252.225,39.775 256.55,44.1 256.9,44.1 D12.1@257,44.2
  Bottom Layer w0.2: v1(95,6) 95.5,5.5 97.5,5.5 101.5,9.5 119.5,9.5 126,3 272,3 273,4 273,32.849 274.525,34.374 v1(274.525,41.975) ; v1(258,44.25) 260.75,44.25 263.05,41.95 v1(264.25,41.95)
NetR1_1: R1.1 R2.2 U1.5 | length 1.9
  Top Layer w0.2: 194.521,54.894 R1.1@195.344,54.894 ; U1.5@194.926,53.97 194.926,54.476 195.194,54.744 195.194,54.794 R1.1@195.294,54.894
NetR2_1: R2.1 R28.2 U1.2 | length 10.3
  Top Layer w0.2: R2.1@194.256,55.803 192.903,55.803 192.375,55.275 192.375,52.7 191.825,52.15 191.825,51.456 192.381,50.9 194.625,50.9 194.675,50.95 194.675,51.15 194.901,51.376 194.901,51.845 U1.2@194.926,51.87
NetR3_2: R3.2 U1.3 | length 1
  Top Layer w0.3: R3.2@195.504,50.919 195.551,50.967 195.551,51.845 U1.3@195.576,51.87
NetR4_1: R4.1 R5.2 U2.5 | length 11.1
  Top Layer w0.2: R5.2@185.197,51.605 185.247,51.605 185.347,51.505 185.347,51.455 185.756,51.047 186.64,51.047 187.475,51.882 v1(187.475,55.95)
  Top Layer w0.3: R4.1@185.375,57.55 185.375,56.477 v1(185.573,56.279) 185.585,56.266 185.585,55.544 U2.5@185.598,55.532
  Bottom Layer w0.3: v1(185.573,56.279) 187.146,56.279 v1(187.475,55.95)
NetR5_1: R5.1 R29.2 U2.2 | length 2.1
  Top Layer w0.2: R29.2@184.195,52.211 184.352,52.211 184.401,52.26 184.538,52.26 184.833,52.555 R5.1@185.197,52.555 185.347,52.655 185.523,53.232 U2.2@185.598,53.432
NetR6_2: R6.2 U2.3 | length 0.9
  Top Layer w0.3: R6.2@186.15,52.625 186.198,52.625 186.248,52.675 U2.3@186.248,53.432
NetR7_1: R7.1 R8.2 U3.5 | length 11.4
  Top Layer w0.2: R7.1@175.825,57.638 175.964,57.5 175.964,57.192 176.403,56.753 ; R8.2@176.078,51.89 176.078,51.305 176.195,51.187 177.412,51.187 178.425,52.2 178.425,55.922 177.594,56.753 176.403,56.753 ; U3.5@176.403,55.923 176.403,56.753
NetR8_1: R8.1 R30.2 U3.2 | length 2.4
  Top Layer w0.2: R30.2@174.85,52.975 174.95,52.875 175.113,52.875 175.117,52.871 175.97,52.871 R8.1@175.995,52.846 176.045,52.846 176.145,52.946 176.145,52.948 176.401,53.204 U3.2@176.401,53.823
NetR9_2: R9.2 U3.3 | length 1
  Top Layer w0.3: R9.2@177.021,52.84 177.028,52.847 177.028,53.798 U3.3@177.053,53.823
NetR10_1: R10.1 R11.2 U4.5 | length 12.4
  Top Layer w0.2: R10.1@263.66,53.882 264.215,53.327 264.215,51.906 264.358,51.764 264.496,51.625 265,51.625 U4.5@265.075,51.55 ; v1(264.8,53.4) v1@264.8,53.423 ; R11.2@269.046,51.502 269.058,51.515 269.808,51.515 v1(269.821,51.527)
  Top Layer w0.3: R10.1@263.488,53.982 264.241,53.982 v1@264.8,53.423
  Bottom Layer w0.3: v1(264.8,53.4) 269.475,53.4 269.825,53.05 v1@269.825,51.35
NetR11_1: R11.1 R31.2 U4.2 | length 2
  Top Layer w0.2: U4.2@267.18,51.555 268.043,51.555 268.196,51.402 268.196,51.238 268.199,51.235 268.199,50.574 R31.2@268.1,50.475
NetR12_2: R12.2 U4.3 | length 1.1
  Top Layer w0.3: U4.3@267.175,52.2 267.177,52.198 267.63,52.198 267.978,52.547 R12.2@268.102,52.547
NetR13_1: R13.1 R14.2 U5.5 | length 13.6
  Top Layer w0.2: v1(175.475,6.4) 175.475,6.498 175.694,6.717 R13.1@175.694,7.55
  Top Layer w0.3: v1(169.9,8.9) 170.67,8.9 R14.2@170.738,8.833 ; U5.5@174.65,7.9 174.675,7.875 175.419,7.875 175.544,7.75 175.594,7.75 175.644,7.7 R13.1@175.644,7.65 175.694,7.6 R13.1@175.694,7.55
  Bottom Layer w0.2: v1(169.9,8.9) 171.825,10.825 174.525,10.825 175.525,9.825 175.525,6.45 v1(175.475,6.4)
NetR14_1: R14.1 R32.2 U5.2 | length 2
  Top Layer w0.25: R14.1@171.7,8.82 171.7,7.9 R32.2@171.7,7.775 171.7,7.825 171.75,7.875 171.901,7.875 171.926,7.9 U5.2@172.55,7.9
NetR15_2: R15.2 U5.3 | length 1.4
  Top Layer w0.25: R15.2@171.337,6.847 172.083,6.847 172.4,7.165 172.4,7.225 172.425,7.25 U5.3@172.55,7.25
NetR16_1: R16.1 R17.2 U6.5 | length 11.7
  Top Layer w0.2: R16.1@263.637,12.475 263.737,12.375 264,12.375 264.5,11.875 264.5,10.875 264.675,10.7 265.187,10.7 U6.5@265.25,10.637 ; R16.1@263.65,12.475 R16.1@263.663,12.487
  Top Layer w0.3: R16.1@263.663,12.487 264,12.487 v1@264.625,12.487 ; R17.2@269.202,10.775 270.078,10.775 v1(270.122,10.819)
  Bottom Layer w0.3: v1@264.637,12.512 264.65,12.5 269.575,12.5 270.122,11.953 v1(270.122,10.819)
  other v1: 264.625,12.5
NetR17_1: R17.1 R33.2 U6.2 | length 1.8
  Top Layer w0.3: U6.2@267.361,10.636 268.143,10.636 268.202,10.675 268.272,10.636 R33.2@268.272,9.753
NetR18_2: R18.2 U6.3 | length 1.1
  Top Layer w0.3: U6.3@267.475,11.275 267.942,11.742 268.213,11.742 268.263,11.792 R18.2@268.263,11.842